# Altium PCB PCB1.PcbDoc
Units mm, origin at the board's own origin, x right, y up, seen from the top; angles counter-clockwise.
Board outline 110 x 60 mm, 2 copper layers (Top Layer, Bottom Layer); 37 components, 36 nets, 223 pads, 0 vias.
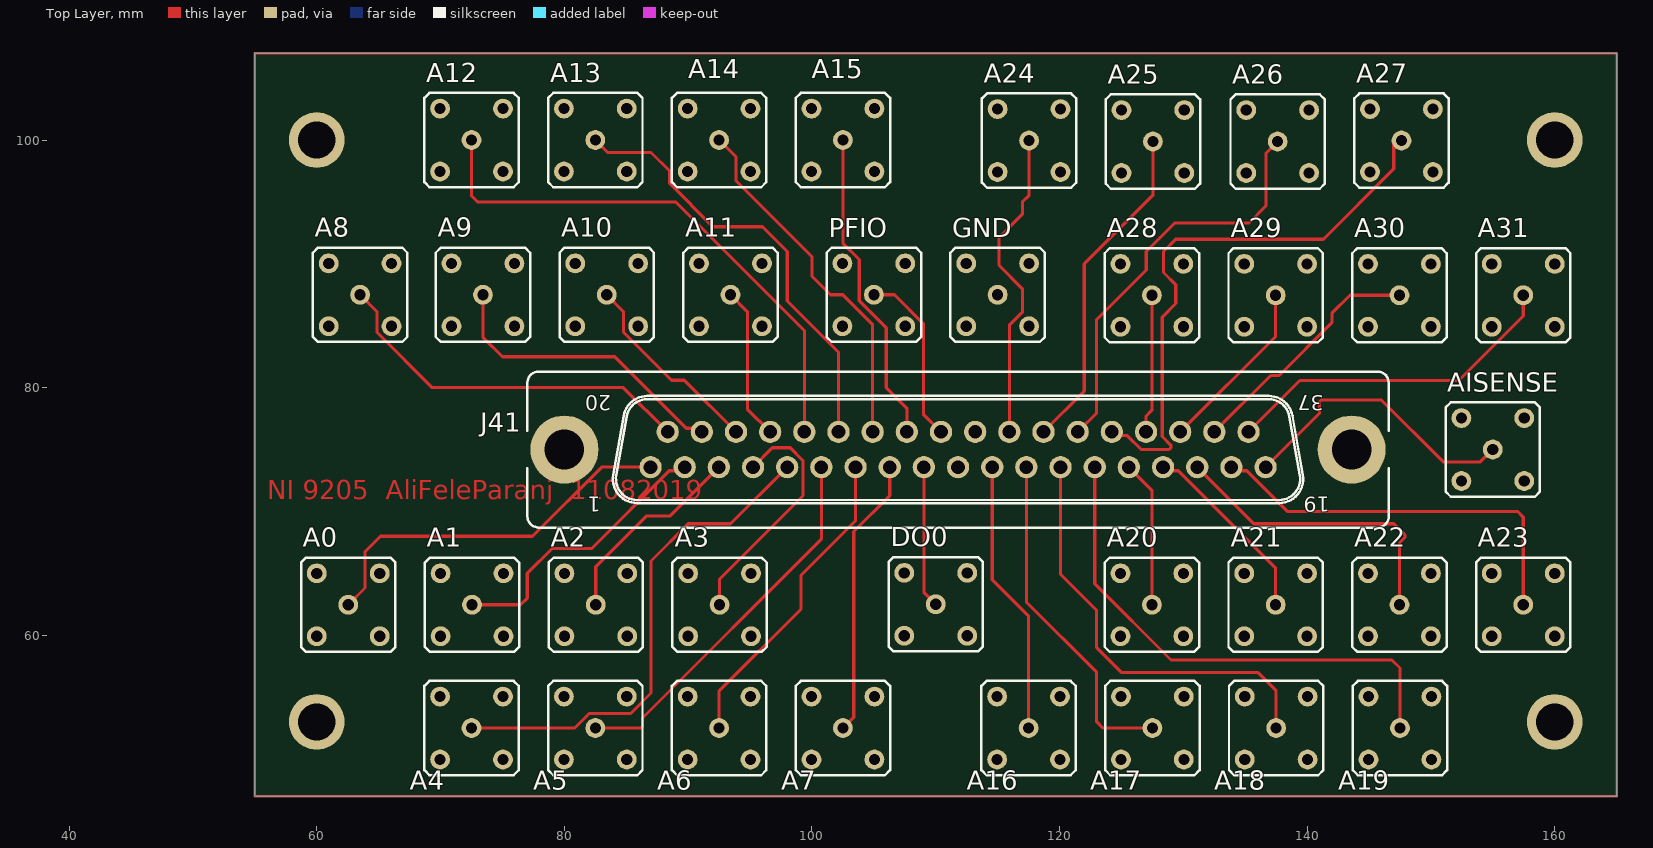
[diagram p0: Top Layer view]
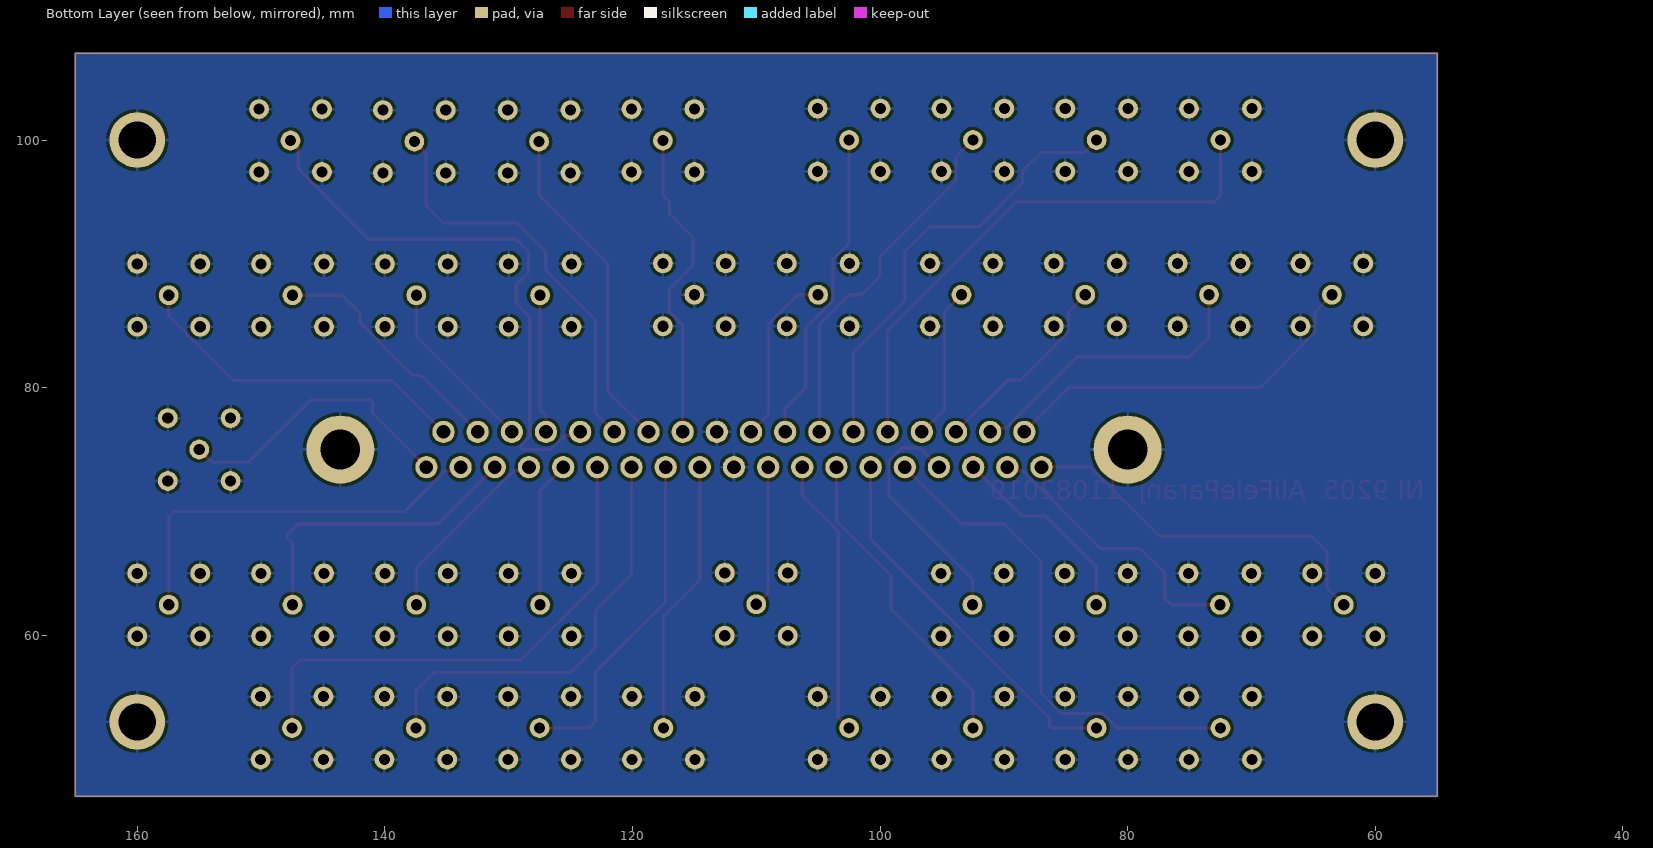
[diagram p1: Bottom Layer view, seen from below]
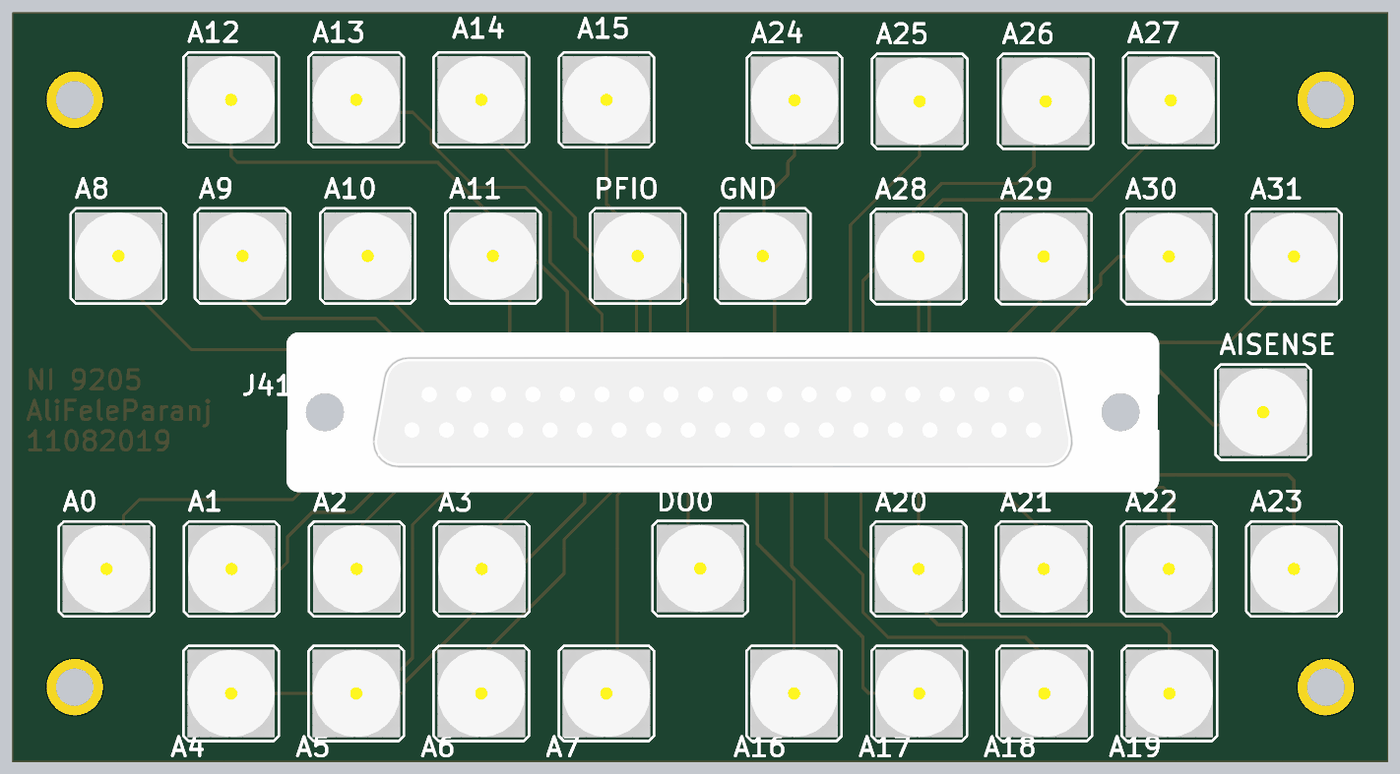
[diagram p2: 3D render of the assembled board from above, using the file's embedded part models]

## Layer stack, top to bottom
Top Solder: solder mask 0.0102, Solder Resist, Dk 3.5
Top Layer: signal copper 0.0356
Dielectric 1: dielectric 0.32, FR-4, Dk 4.8
Bottom Layer: signal copper 0.0356
Bottom Solder: solder mask 0.0102, Solder Resist, Dk 3.5

## Board outline
55,47 165,47 165,63 165,93 165,107 55,107

## Design rules (kind name [scope] priority, off if disabled: settings)
Clearance [All] p1: gap=0.254 ignorepadtopadclearanceinfootprint=FALSE except(0: Arc-Hole Track-Hole SMDPad-Hole THPad-Hole Via-Hole Fill-Hole Poly-Hole Region-Hole Text-Hole)
PolygonConnect [All] p1: connectstyle=Relief reliefconductorwidth=0.254 reliefentries=4 polygonreliefangle="90 Angle" airgapwidth=0.254
RoutingLayers "Schematic Routing Layers" [InNet('GND')] p1: top layer_v5=FALSE bottom layer_v5=TRUE
RoutingLayers [All] p2: top layer_v5=TRUE bottom layer_v5=TRUE
RoutingVias [All] p1: holewidth=0.711 width=1.27 viastyle="Through Hole" minholewidth=0.711 minwidth=1.27 maxholewidth=0.711 maxwidth=1.27
SolderMaskExpansion [All] p1: expansion=0.102
Width [All] p1: maxlimit=0.254 minlimit=0.254 preferedwidth=0.254
29 further rules are at their usual default settings.

## Components (designator, comment, footprint, x,y, rotation, side; value= is the part's Value field where it differs from the comment)
A0 "LEMO 00" LEMO_EPA.00.250.NTN 62.54,62.46 r0 top
A1 "LEMO 00" LEMO_EPA.00.250.NTN 72.54,62.46 r0 top
A2 "LEMO 00" LEMO_EPA.00.250.NTN 82.54,62.46 r0 top
A3 "LEMO 00" LEMO_EPA.00.250.NTN 92.54,62.46 r0 top
A4 "LEMO 00" LEMO_EPA.00.250.NTN 72.5,52.5 r0 top
A5 "LEMO 00" LEMO_EPA.00.250.NTN 82.5,52.5 r0 top
A6 "LEMO 00" LEMO_EPA.00.250.NTN 92.5,52.5 r0 top
A7 "LEMO 00" LEMO_EPA.00.250.NTN 102.5,52.5 r0 top
A8 "LEMO 00" LEMO_EPA.00.250.NTN 63.5,87.5 r0 top
A9 "LEMO 00" LEMO_EPA.00.250.NTN 73.42,87.5 r0 top
A10 "LEMO 00" LEMO_EPA.00.250.NTN 83.42,87.5 r0 top
A11 "LEMO 00" LEMO_EPA.00.250.NTN 93.42,87.5 r0 top
A12 "LEMO 00" LEMO_EPA.00.250.NTN 72.5,100 r0 top
A13 "LEMO 00" LEMO_EPA.00.250.NTN 82.5,100 r0 top
A14 "LEMO 00" LEMO_EPA.00.250.NTN 92.5,100 r0 top
A15 "LEMO 00" LEMO_EPA.00.250.NTN 102.5,100 r0 top
A16 "LEMO 00" LEMO_EPA.00.250.NTN 117.5,52.5 r0 top
A17 "LEMO 00" LEMO_EPA.00.250.NTN 127.5,52.5 r0 top
A18 "LEMO 00" LEMO_EPA.00.250.NTN 137.5,52.5 r0 top
A19 "LEMO 00" LEMO_EPA.00.250.NTN 147.5,52.5 r0 top
A20 "LEMO 00" LEMO_EPA.00.250.NTN 127.46,62.46 r0 top
A21 "LEMO 00" LEMO_EPA.00.250.NTN 137.46,62.46 r0 top
A22 "LEMO 00" LEMO_EPA.00.250.NTN 147.46,62.46 r0 top
A23 "LEMO 00" LEMO_EPA.00.250.NTN 157.46,62.46 r0 top
A24 "LEMO 00" LEMO_EPA.00.250.NTN 117.54,99.96 r0 top
A25 "LEMO 00" LEMO_EPA.00.250.NTN 127.54,99.88 r0 top
A26 "LEMO 00" LEMO_EPA.00.250.NTN 137.62,99.88 r0 top
A27 "LEMO 00" LEMO_EPA.00.250.NTN 147.62,99.96 r0 top
A28 "LEMO 00" LEMO_EPA.00.250.NTN 127.46,87.46 r0 top
A29 "LEMO 00" LEMO_EPA.00.250.NTN 137.46,87.46 r0 top
A30 "LEMO 00" LEMO_EPA.00.250.NTN 147.46,87.46 r0 top
A31 "LEMO 00" LEMO_EPA.00.250.NTN 157.46,87.46 r0 top
AISENSE "LEMO 00" LEMO_EPA.00.250.NTN 155,75 r0 top
DO0 "LEMO 00" LEMO_EPA.00.250.NTN 110,62.5 r0 top
GND "LEMO 00" LEMO_EPA.00.250.NTN 115,87.5 r0 top
J41 "D-SUB37F" NORCOMP_172-037-242R011 111.801,75 r180 top
PFIO "LEMO 00" LEMO_EPA.00.250.NTN 105,87.5 r0 top

## Footprints (in the part's own frame and the unit in brackets; to place one, negate y for a bottom-side part, rotate by r counter-clockwise, add the part's x,y. Pads: shape width x height; smd on the part's side, far side on the other; paste and mask are expansions set on the pad)
LEMO_EPA.00.250.NTN [mm] "50 Ohm size 00 Coaxial Straight socket"
  round 1.6 hole 0.9: 1(0,0) 2(-2.54,-2.54) 2(-2.54,2.54) 2(2.54,-2.54) 2(2.54,2.54)
  silkscreen extent -3.81,-3.81 3.81,3.81, body extent -3.5,-3.5 3.5,3.5, height 14
NORCOMP_172-037-242R011 [mm] "Straight Wire Wrap D-Sub 37 Contacts Female Connector"
  round 1.8 hole 1.1: 1(24.842,1.422) 2(22.082,1.422) 3(19.322,1.422) 4(16.561,1.422) 5(13.801,1.422) 6(11.041,1.422) 7(8.281,1.422) 8(5.52,1.422) 9(2.76,1.422) 10(0,1.422) 11(-2.76,1.422) 12(-5.52,1.422) 13(-8.281,1.422) 14(-11.041,1.422) 15(-13.801,1.422) 16(-16.561,1.422) 17(-19.322,1.422) 18(-22.082,1.422) 19(-24.842,1.422) 20(23.458,-1.422) 21(20.697,-1.422) 22(17.937,-1.422) 23(15.177,-1.422) 24(12.417,-1.422) 25(9.657,-1.422) 26(6.896,-1.422) 27(4.136,-1.422) 28(1.376,-1.422) 29(-1.384,-1.422) 30(-4.145,-1.422) 31(-6.905,-1.422) 32(-9.665,-1.422) 33(-12.425,-1.422) 34(-15.185,-1.422) 35(-17.946,-1.422) 36(-20.706,-1.422) 37(-23.466,-1.422)
  round 5.5 hole 3.2: 38(-31.8,0) 39(31.801,0)
  silkscreen extent -34.79,-6.3 34.79,6.3, body extent -34.78,-6.3 34.79,6.3, height 11.93

## Part data
A0 A1 A2 A3 A4 A5 A6 A7 A8 A9 A10 A11 A12 A13 A14 A15 A16 A17 A18 A19 A20 A21 A22 A23 A24 A25 A26 A27 A28 A29 A30 A31 AISENSE DO0 GND PFIO: library part LEMO_EPA.00.250.NTN, Manufacturer=LEMO, Manufacturer Part Number=EPA.00.250.NTN, Author="CERN DEM JLC", ComponentHeight=14mm, Component Type=Standard, CreateDate=22/04/2008, Family="LEMO 00", HelpURL=\\cern.ch\dfs\Applications\Altium\Datasheets\LEMO_EPA.00.250.NTN.pdf, LatestRevisionDate=22/04/2008, Mounted=Yes, Part Description="Size 00, 50 Ohms Coaxial Straight socket", Part Number=LEMO_EPA.00.250.NTN, Pin Count=2, PressFit=No, SCEM=09.46.11.184.2, Sense=No, SMD=No, Socket=No, Status=None
J41: library part NORCOMP_172-037-242R011, "Connector D-sub 37 Female", Manufacturer=NORCOMP, Manufacturer Part Number=172-037-242R011, Author="CERN DEM MR", ComponentHeight=12.08mm, Component Type=Standard, CreateDate=24/03/2016, Family=D-SUB37F, HelpURL=\\cern.ch\dfs\Applications\Altium\Datasheets\NORCOMP_172-037-242R011.pdf, LatestRevisionDate=24/03/2016, Mounted=Yes, Part Description="Straight Wire Wrap D-Sub 37 Contacts Female Connector With 0.065\"Clinch Nut (Board Side)", Part Number=NORCOMP_172-037-242R011, Pin Count=39, PressFit=No, Sense=No, SMD=No, Socket=No, Status=None

## Free pads (board coordinates)
  round 4.5 hole 3: 11(60,53) 11(60,100) 11(160,53) 11(160,100)

## Nets (pads, with @x,y where several pads share a name; then routed paths per layer and width w, separated by ;. In a path a pad name is that pad's centre, name@x,y a point inside that pad or via, vN(x,y) a via of type N, cw(c..) or ccw(c..) an arc to the next point about the centre after c; other vN are vias at no path point)
A0: A0.1 J41.1 | length 30.7
  Top Layer w0.254: A0.1 63.899,63.819 63.899,66.75 65.149,68 77.428,68 83.005,73.578 J41.1
A1: A1.1 J41.2 | length 23
  Top Layer w0.254: A1.1 76.46,62.46 77,63 77,65 79,67 82.193,67 88.475,73.282 89.424,73.282 J41.2
A2: A2.1 J41.3 | length 16.3
  Top Layer w0.254: A2.1 82.54,65.54 86.641,69.641 88.543,69.641 J41.3
A3: A3.1 J41.4 | length 19.6
  Top Layer w0.254: A3.1 92.54,64.54 99.281,71.281 99.281,74.108 98.248,75.141 96.804,75.141 J41.4
A4: A4.1 J41.5 | length 40.5
  Top Layer w0.254: A4.1 80.83,52.5 82.011,53.681 85.351,53.681 87,55.33 87,66 90,69 93.423,69 J41.5
A5: A5.1 J41.6 | length 30.8
  Top Layer w0.254: A5.1 86.161,52.5 86.31,52.649 86.31,53.31 100.76,67.76 J41.6
A6: A6.1 J41.7 | length 25.6
  Top Layer w0.254: A6.1 92.5,55.5 99.112,62.112 99.112,64.831 103.521,69.239 J41.7
A7: A7.1 J41.8 | length 22.6
  Top Layer w0.254: A7.1 103.379,53.379 103.379,68.379 106.281,71.281 J41.8
A8: A8.1 J41.20 | length 30.4
  Top Layer w0.254: A8.1 64.859,86.141 64.859,84.471 69.33,80 84.766,80 J41.20
A9: A9.1 J41.21 | length 24.3
  Top Layer w0.254: A9.1 73.42,84.08 75,82.5 84.078,82.5 89.859,76.718 90.808,76.718 J41.21
A10: A10.1 J41.22 | length 16
  Top Layer w0.254: A10.1 84.779,86.141 84.779,84.471 88.655,80.595 89.692,80.595 J41.22
A11: A11.1 J41.23 | length 12.4
  Top Layer w0.254: A11.1 94.779,86.141 94.779,78.268 J41.23
A12: A12.1 J41.24 | length 44.1
  Top Layer w0.254: A12.1 72.5,95.5 73,95 89,95 99.384,84.616 J41.24
A13: A13.1 J41.25 | length 36.1
  Top Layer w0.254: A13.1 83.5,99 87,99 88.5,97.5 88.5,96.5 92,93 96,93 98,91 98,87 102.145,82.855 J41.25
A14: A14.1 J41.26 | length 29.3
  Top Layer w0.254: A14.1 93.859,98.641 93.859,96.709 100,90.568 100,89 101.5,87.5 102.5,87.5 104.905,85.095 J41.26
A16: A16.1 J41.11 | length 22.3
  Top Layer w0.254: J41.11 114.561,64.481 117.5,61.542 A16.1
A17: A17.1 J41.12 | length 27.6
  Top Layer w0.254: J41.12 117.322,62.678 123,57 123,53 123.5,52.5 A17.1
A18: A18.1 J41.13 | length 34.7
  Top Layer w0.254: J41.13 120.082,64.918 123,62 123,59 125,57 136,57 137.5,55.5 A18.1
A19: A19.1 J41.14 | length 41.7
  Top Layer w0.254: J41.14 122.842,64.158 129,58 146.851,58 147.5,57.351 A19.1
A20: A20.1 J41.15 | length 11.9
  Top Layer w0.254: J41.15 127.46,71.72 A20.1
A21: A21.1 J41.16 | length 15.4
  Top Layer w0.254: J41.16 128.658,73.282 129.585,73.282 137.46,65.406 A21.1
A22: A22.1 J41.17 | length 24.9
  Top Layer w0.254: J41.17 135.7,69 147,69 147.895,68.105 147.895,67.895 147.46,67.46 A22.1
A23: A23.1 J41.18 | length 32.3
  Top Layer w0.254: J41.18 134.179,73.282 135.127,73.282 138.409,70 157,70 157.46,69.54 A23.1
A24: A24.1 J41.30 | length 25.8
  Top Layer w0.254: J41.30 115.946,85.036 117,86.09 117,88 115.105,89.895 115.105,92.105 117,94 117,95 117.54,95.54 A24.1
A25: A25.1 J41.31 | length 27.1
  Top Layer w0.254: J41.31 122,79.716 122,90 127.54,95.54 A25.1
A26: A26.1 J41.32 | length 33.7
  Top Layer w0.254: J41.32 123,77.956 123,85.5 127,89.5 127,91 129.3,93.3 135.3,93.3 136.681,94.681 136.681,98.941 A26.1
A27: A27.1 J41.33 | length 46.7
  Top Layer w0.254: J41.33 124.522,76.127 125.471,76.127 126.597,75 128.85,75 128.998,75.149 128.998,75.359 128.3,76.058 128.3,85.7 129.392,86.792 129.392,88.308 128.4,89.3 128.4,91 129.392,91.992 141.322,91.992 147,97.67 147,99.96 A27.1
A28: A28.1 J41.34 | length 11.2
  Top Layer w0.254: J41.34 126.987,77.703 127.46,78.177 A28.1
A29: A29.1 J41.35 | length 14.2
  Top Layer w0.254: J41.35 137.46,84.136 A29.1
A30: A30.1 J41.36 | length 20
  Top Layer w0.254: J41.36 137.069,80.984 137.734,80.984 142,85.25 142,86 143.46,87.46 A30.1
A31: A31.1 J41.37 | length 27.7
  Top Layer w0.254: J41.37 139.419,80.575 152.245,80.575 157.46,85.79 A31.1
AISENSE: AISENSE.1 J41.19 | length 23.6
  Top Layer w0.254: J41.19 141,77.934 141,78.851 141.149,79 146,79 151,74 154,74 AISENSE.1
DO0: DO0.1 J41.9 | length 11.5
  Top Layer w0.254: J41.9 109.041,63.459 DO0.1
GND: A0.2 A1.2 A2.2 A3.2 A4.2 A5.2 A6.2 A7.2 A8.2 A9.2 A10.2 A11.2 A12.2 A13.2 A14.2 A15.2 A16.2 A17.2 A18.2 A19.2 A20.2 A21.2 A22.2 A23.2 A24.2 A25.2 A26.2 A27.2 A28.2 A29.2 A30.2 A31.2 AISENSE.2 DO0.2 GND.1 GND.2 J41.10 J41.29 J41.38 J41.39 pad.11 PFIO.2
PFIO: J41.28 PFIO.1 | length 14.3
  Top Layer w0.254: PFIO.1 106.67,87.5 109,85.17 109,77.848 J41.28
Z15: A15.1 J41.27 | length 25.7
  Top Layer w0.254: A15.1 102.5,91.67 103.819,90.351 103.819,87.011 106,84.83 106,80 107.665,78.335 J41.27
copper on no net: | length 340
  Top Layer w0.2: 55,47 55,107 165,107 165,93 165,63 165,47 55,47

## Polygon pours and split planes (outlines as drawn)
GND on Bottom Layer "Bottom Layer-GND" (solid, remove dead copper, pour order 40): 55,107 165,107 165,47 55,47
GND on Bottom Layer "Bottom Layer-GND 1" (solid, pour order 32): 45,88
GND on Bottom Layer "Bottom Layer-GND 2" (solid, pour order 18): 51.75,105.75

## Other copper
Top Layer:
  text "NI 9205  AliFeleParanj  11082019" at 56,71 h1.52
Bottom Layer:
  region net GND: 40.5,48.375

## Text inside footprints (layer, text, board x,y; h text height)
J41: Top Overlay "20" at 83.771,79.4 h1.2 r180; Top Overlay "19" at 141.832,71.2 h1.2 r180; Top Overlay "37" at 141.332,79.4 h1.2 r180; Top Overlay "1" at 82.921,71.2 h1.2 r180; Mechanical 14 "1" at 82.921,71.2 h1.2 r180; Mechanical 14 "37" at 141.332,79.4 h1.2 r180; Mechanical 14 "19" at 141.832,71.2 h1.2 r180; Mechanical 14 "20" at 83.771,79.4 h1.2 r180